# EAGLE board WifiLamp_Hardware (EAGLE 7.1.0)
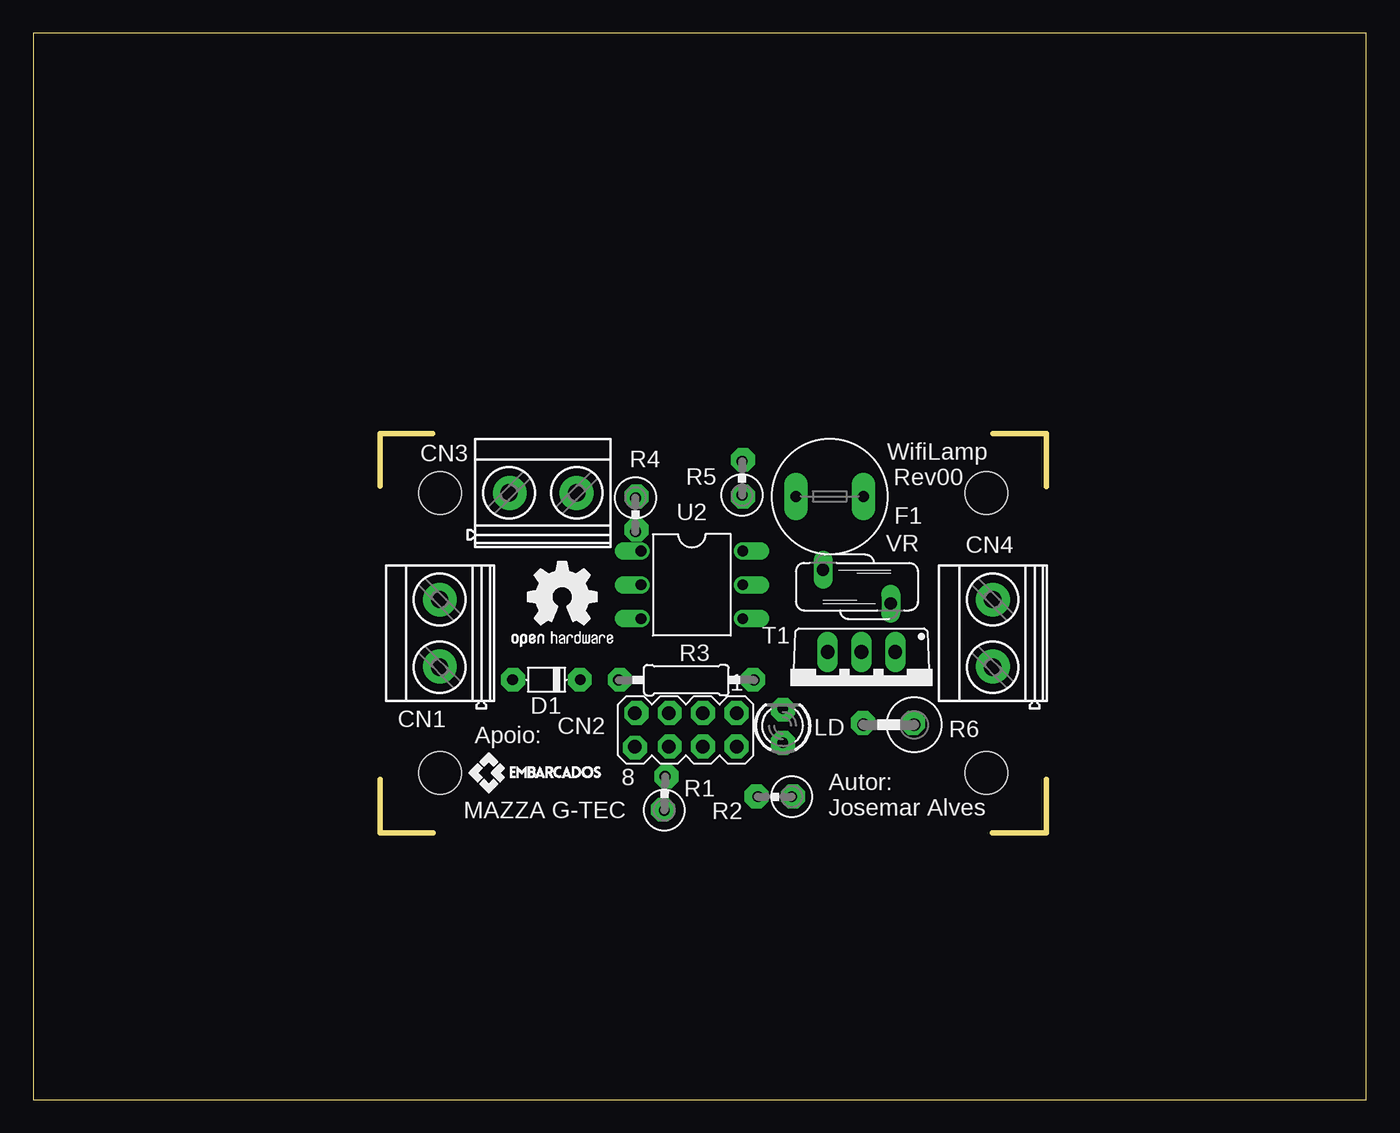
[diagram p0: board, top side]
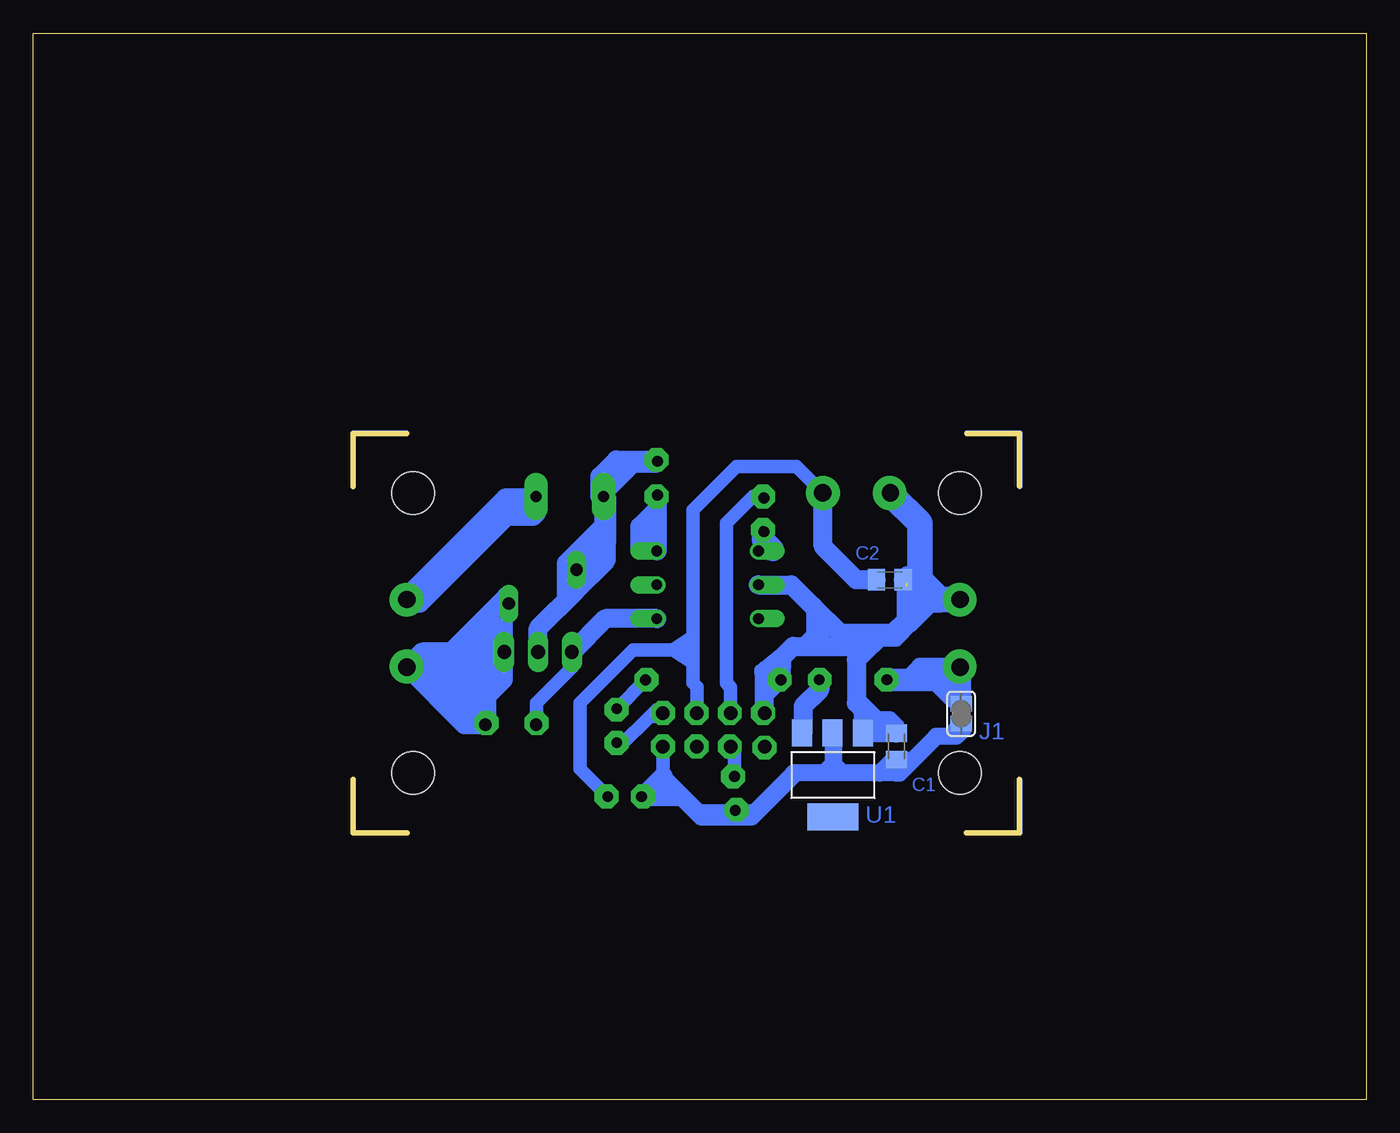
[diagram p1: board, bottom side, seen from below]

Size 100 x 80 mm. Coordinates in mm from the lower left corner, seen from the top.
Outline: 26.01,46.02 26.01,49.99 29.95,49.99
Outline: 26.01,24 26.01,19.99 30,19.99
Outline: 71.96,20.02 76,20.02 76,24
Outline: 71.98,49.99 76,49.99 76,46
Outline: 0,0 100,0 100,80 0,80 0,0
Copper layers (1*16): Top 0.035mm / dielectric 1.5mm / Bottom 0.035mm
Design rules "default": minimum track width 10mil, minimum drill 24mil, track to track 8mil, track to pad 8mil, pad to pad 8mil, via to via 8mil, smd to smd 8mil, copper to edge 40mil, drill to drill 8mil, minimum pad ring 10mil, minimum via ring 8mil, stop-mask expansion 4mil, vias tented up to drill 0mil, thermal gap 10mil
Holes 3.2 mm at 30.5,24.5 30.5,45.5 71.5,45.5 71.5,24.5

## Footprints (pad centres in the part's own frame; a part is rotated, then mirrored left to right if it is on the bottom)
C0805K = smd 1.3 x 1.6: 1 -1,0; 2 1,0
MKDSN1,5/2-5,08 = drill 1.3 pad 2: 1 -2.561,0.025; 2 2.519,0.025
MA04-2 = drill 1.016 octagon: 1 -3.81,-1.27; 2 -3.81,1.27; 3 -1.27,-1.27; 4 -1.27,1.27; 5 1.27,-1.27; 6 1.27,1.27; 7 3.81,-1.27; 8 3.81,1.27
D-5 = drill 0.813 octagon: A 2.54,0; C -2.54,0
TR5 = drill 0.813 pad 1.778 long: 1 -2.54,0; 2 2.54,0
SJ = smd 1.168 x 1.6: 1 -0.762,0; 2 0.762,0
LED3MM = drill 0.813 octagon: A -1.27,0; K 1.27,0
0309V = drill 0.813 octagon: 1 -1.27,0; 2 1.27,0
0207/10 = drill 0.813 octagon: 1 -5.08,0; 2 5.08,0
0411V = drill 0.914 octagon: 1 -2.54,0; 2 1.27,0
TO220BV = drill 1.016 long: G 2.54,-2.54; T1 -2.54,-2.54; T2 0,-2.54
SOT223 = smd 1.499 x 2.007: 1 -2.261,-3.15; 2 0.025,-3.15; 3 2.311,-3.15 | smd 3.81 x 2.007: 4 0,3.15
DIL06 = drill 0.813 offset: 1 -2.54,-3.81; 2 0,-3.81; 3 2.54,-3.81; 4 2.54,3.81; 5 0,3.81; 6 -2.54,3.81
S07K230 = drill 0.914 long: 1 -1.27,-2.54; 2 1.27,2.54

## Placement (x,y rotation side)
C1  100nF  [C0805K]  35.25,26.5 90 bottom
C2  100nF  [C0805K]  35.75,39 0 bottom
CN1  MKDSN1,5/2-5,08  [MKDSN1,5/2-5,08]  30.5,35 90 top
CN2  [MA04-2]  48.95,27.73 180 top
CN3  MKDSN1,5/2-5,08  [MKDSN1,5/2-5,08]  38.25,45.5 0 top
CN4  MKDSN1,5/2-5,08  [MKDSN1,5/2-5,08]  72,35 90 top
D1  1N4148  [D-5]  38.5,31.5 180 top
F1  FUSETR5  [TR5]  59.75,45.25 0 top
J1  [SJ]  30.39,28.95 270 bottom
LD  [LED3MM]  56.22,28.05 90 top
R1  10k  [0309V]  47.37,22.97 88.7 top
R2  10k  [0309V]  55.63,22.72 180 top
R3  180  [0207/10]  48.99,31.47 0 top
R4  180  [0309V]  45.18,43.87 270 top
R5  360  [0309V]  53.17,46.62 90 top
R6  330  [0411V]  63.55,28.12 180 top
T1  BTA12  [TO220BV]  62.13,31.04 180 top
U1  LM1117  [SOT223]  40.01,24.35 180 bottom
U2  MOC3041M  [DIL06]  49.41,38.62 270 top
VR  S07K230  [S07K230]  61.79,38.48 270 top

## Library data of the parts
C1 C2 = rcl
CN1 CN3 CN4 = con-phoenix-508
CN2 = con-lstb; OC_FARNELL: unknown; OC_NEWARK: unknown
D1 = diode
F1 = fuse; OC_FARNELL: unknown; OC_NEWARK: unknown
J1 = jumper
LD = led
R1-R6 = resistor
T1 = triac
U1 = burr-brown; MPN: REG1117; OC_FARNELL: 1097566; OC_NEWARK: 14P6981
U2 = optocoupler; MF: FAIRCHILD SEMICONDUCTOR; MPN: MOC3041M; OC_FARNELL: 1086677; OC_NEWARK: 78K6090
VR = varistor

## Nets
FS: F1.1 R5.2 T1.T2 VR.1
GND: C1.2 C2.2 CN1.2 CN2.7 CN3.1 R3.1 U1.1 U2.2
N$1: R5.1 U2.6
N$2: R6.2 T1.G U2.4
N$3: R4.2 U2.1
N$5: CN2.6 R1.2
N$7: CN4.2 F1.2
N$8: CN2.5 R4.1
N$9: D1.C U1.3
N$50: C2.1 CN2.3 CN3.2 R2.1
N$66: CN2.1 LD.A
N$69: LD.K R3.2
N$70: CN1.1 D1.A J1.1
N$72: CN4.1 R6.1 T1.T1 VR.2
N$89: C1.1 CN2.2 J1.2 R1.1 R2.2 U1.2

## Tracks (layer width: path | path; a pad name or v marks a point on that pad's centre or on a via)
FS
  Bottom 1.422: R5.2 53.31,47.75 55,47.75 57.21,45.54 F1.1 57.21,43.04 59.25,41 | 59.25,41 VR.1 59.25,38.25 62.13,35.37 T1.T2 | 60,37.75 60,40.25 59.25,41
GND  (1 unrouted)
  Bottom 0.813: 42.25,34.25 41.5,35
  Bottom 1.016: 34,39 34,37.75 | 34,37.75 34,35.75 35.25,34.5 38.75,34.5 | 34.5,38.5 34.5,38.25 34,37.75 | 41.5,34 41.5,35 41.5,37
  Bottom 1.27: C1.2 35.25,28 35.75,28.5 37,28.5
  Bottom 1.422: 37.5,33.75 37.88,33.38 | 37.88,33.38 38.25,33 38.25,29.75 37.75,29.25 U1.1 | CN2.7 45.14,31.99 R3.1 43.78,33.22 43.75,33.25 | U2.2 43.12,38.62 41.5,37 39.5,35 | 39.5,35 38.5,34 | 38.5,34 38,33.5 | 38,33.5 37.88,33.38 | 43.75,33.25 43,34 41.5,34 38.5,34 | C2.2 34,39 33.75,39 33.5,39 33.44,39 33.19,39.25 | C1.2 U1.1 | U1.1 | 43.75,33.25 45,32.25 45,31.75 | 38,33.5 37.75,33.5 36.5,34.75 | 39.5,35 35.5,35 34.5,36 34.5,38.75
  Bottom 1.93: CN3.1 35.69,45.44 33.5,43.25 33.5,39.25 33.75,39 | CN1.2 32.02,37.52 33.5,39
N$1
  Bottom 1.422: U2.6 53.17,41.16 R5.1
N$2  (via drill 0.6 pad 1.78)
  Bottom 1.016: T1.G 59.59,32.41 62.25,29.75 v62.25,28.25 62.25,28.15 R6.2
  Bottom 1.422: U2.4 57.09,36.08 T1.G
N$3
  Bottom 1.016: R4.2 45.18,41.58 U2.1
N$4
  Bottom 1.016: 34.5,39.25 34.5,39.5
N$5
  Bottom 1.016: R1.2 47.4,26.18 CN2.6
N$7
  Bottom 1.778: CN4.2 64.5,45 62.54,45 F1.2
N$8
  Bottom 1.016: CN2.5 47.68,30.93 48,31.25 48,43.25 46,45.25 45.29,45.25 R4.1
N$9  (via drill 0.6 pad 1.78)
  Bottom 1.422: D1.C v41,31.5 41,30.75 42.25,29.5 42.25,27.57 U1.3
N$10  (via drill 0.6 pad 1.78)
  other vias: 36,31.5
N$11  (via drill 0.6 pad 1.78)
  other vias: 44,31.5
N$12
  Bottom 0.406: 26,24 26,20 30,20
N$13
  Bottom 1.016: 40.75,34.5 40.75,35.5
N$14
  Bottom 0.406: 26,46 26,50 29.95,50
N$15
  Bottom 0.406: 72,50 76,50 76,46
N$16
  Bottom 0.406: 72,20 76,20 76,24
N$17
  Bottom 1.016: 38,30 35.75,27.75
N$24  (via drill 0.6 pad 1.78)
  Bottom 1.422: 51.5,22.75 v54.25,22.75 52.75,24.25
N$26  (via drill 0.6 pad 1.78)
  other vias: 45.25,29 45.15,26.4
N$29  (via drill 0.6 pad 1.78)
  other vias: 47.75,29
N$31
  Bottom 1.016: 44,31.25 45,30.25
N$33  (via drill 0.6 pad 1.78)
  other vias: 50.25,29
N$34  (via drill 0.6 pad 1.78)
  other vias: 47.75,26.5
N$36  (via drill 0.6 pad 1.78)
  other vias: 50.25,26.5
N$37  (via drill 0.6 pad 1.78)
  other vias: 52.75,26.5
N$38  (via drill 0.6 pad 1.78)
  other vias: 52.75,29
N$39  (via drill 0.6 pad 1.78)
  other vias: 47.5,24.25
N$40  (via drill 0.6 pad 1.78)
  other vias: 57,22.75
N$43  (via drill 0.6 pad 1.78)
  other vias: 56.25,26.75
N$44  (via drill 0.6 pad 1.78)
  other vias: 56.25,29.25
N$45  (via drill 0.6 pad 1.78)
  other vias: 54,31.5
N$49  (via drill 0.6 pad 1.78)
  other vias: 45.25,45.25
N$50  (via drill 0.6 pad 2.54)
  Bottom 1.016: CN2.3 50.22,30.97 50.5,31.25 50.5,32.75 | 50.5,32.75 50.5,34 | 50.5,34 50.5,34.75 | 50.5,34.75 50.5,44.25 47.25,47.5 42.74,47.5 CN3.2 | 52,33.75 55,33.75 59,29.75 59,24.82 R2.1 | 52,33.75 50.75,33.75 50.5,34 | 50.5,32.75 52,33.75 | 52,33.75 50.5,34.75
  Bottom 1.422: C2.1 38.25,39 40.75,41.5 v40.75,45.5 v40.75,45.51 CN3.2
N$51  (via drill 0.6 pad 1.78)
  other vias: 45.25,42.75
N$52  (via drill 0.6 pad 1.78)
  other vias: 53.25,45.25
N$53  (via drill 0.6 pad 2.54)
  other vias: 30.5,37.5
N$54  (via drill 0.6 pad 2.54)
  other vias: 35.75,45.5
N$56  (via drill 0.6 pad 2.54)
  other vias: 72,37.5
N$58  (via drill 0.6 pad 2.54)
  other vias: 72,32.5
N$59
  Bottom 0.813: 45.5,32 45.5,32.25
N$60  (via drill 0.6 pad 1.78)
  Bottom 1.422: 64.75,33.5 64.75,31.5 66,30.25 v66,28.25 71,33.25 69.5,33.25 66.5,30.25 66.5,31.25 67.75,32.5 65.75,32.5 65.75,31.25
N$61
  Bottom 1.422: 64.5,37.75 68.75,33.5
N$62
  Bottom 1.422: 65,35.75 65,35.5 67,33.5
N$65
  Bottom 1.422: 62.25,45 62.25,44 62.5,43.75 64.5,43.75 71,37.25 72,37.25
N$66
  Bottom 1.016: LD.A 55.97,26.53 53.75,28.75 | 53.75,28.75 53.01,28.75 CN2.1 | 53.75,28.75 53.25,29.25 52.75,29.25
N$67  (via drill 0.6 pad 1.78)
  Bottom 1.422: 57.5,45.25 57.5,46.75 56.25,48 v53.25,48
N$69
  Bottom 1.016: R3.2 LD.K
N$70
  Bottom 1.016: J1.1 30.39,31.64 30.83,32.08
  Bottom 1.27: 30.5,29.75 30.5,30 | 30.5,30 30.5,31.5 | 30.5,30 31,30 32.5,31.5
  Bottom 1.676: D1.A 32.5,31.5 31.41,31.5 30.83,32.08 CN1.1
N$72
  Bottom 1.422: VR.2 64.33,37.17 64.75,36.75 64.75,33.66 T1.T1 70.83,33.58 CN4.1 67.66,28.12 R6.1
N$74
  Bottom 1.422: 59.75,38 59.5,38 57,40.5 57,41.75 | 57,45.25 57,41.75 | 57,41.75 59,39.75
N$75
  Bottom 1.422: 36,27.75 37.5,27.75
N$76
  Bottom 1.422: 54.5,41.25 54.5,43 53.25,44.25
N$88
  Bottom 1.27: 30.25,29.75 30.25,32.25
N$89  (via drill 0.6 pad 1.78)
  Bottom 0.813: 38.95,24.45 39,24.5 | 39,24.5 39.5,25 | 39.5,25 40,25.5 | 40,25.5 40,27.46 U1.2 | 45.82,21.18 R1.1 48.05,21 | 45.82,21.18 42.5,24.5 | 42.5,24.5 41,24.5 | 41,24.5 39,24.5 | 52.5,23.5 50,21 48.05,21 | 40,25.5 41,24.5 | 39.5,25 39.75,25 | 39.75,25 40.25,25 40.25,27.25 | 48.05,21 46,21 45.82,21.18 | 42.5,24.5 43,24.5 43.25,24.5 46,21.75 | 45.5,21.75 46,21.75 | 46,21.75 v47.25,21.75 50,21.75 | 50,21.75 50.5,21.75 | 50,21.75 52.25,24 | 39.75,27.25 39.75,25
  Bottom 1.016: R2.2 53.8,22.72 52.76,23.76 | CN2.2 52.76,23.76 | 52.76,23.76 52.5,23.5 | C1.1 35.25,24.5
  Bottom 1.27: 30.25,28 30.25,27.75 30.75,27.25 31.25,27.25 | 36.5,24.5 35.25,24.5 35,24.5 34,25.5 | 36.5,24.5 43,24.5 | J1.2 30.39,28.11 31.25,27.25 | 31.25,27.25 32.25,27.25 34,25.5 | 36.5,24.5 35.5,25.5 34,25.5
N$90  (via drill 0.6 pad 2.54)
  Bottom 1.27: v30.5,32.5 33.5,32.5 34.25,31.75
N$91
  Bottom 1.422: 34.25,35.75 32.5,37.5
  Bottom 1.93: 32,37.5 32.5,37.5 33.5,37.5 34.25,36.75
N$92
  Bottom 1.676: 45.25,42.5 45.25,42 44.5,41.25

## Text on the board
tNames: WifiLamp / Rev00 | Apoio: | MAZZA G-TEC | Autor: / Josemar Alves
_Bottom: C2 | J1 | C1 | U1
_tNames: CN3 | R4 | R5 | U2 | F1 | CN4 | VR | T1 | R3 | D1 | CN1 | CN2 | LD | R6 | R1 | R2